# Altium PCB yakimenko_power_control.PcbDoc (part 1 of 2)
Units mm, origin at the board's own origin, x right, y up, seen from the top; angles counter-clockwise.
Board outline 110 x 51 mm, 2 copper layers (Top Layer, Bottom Layer), stack 1.536 mm thick; 65 components, 40 nets, 213 pads, 270 vias.
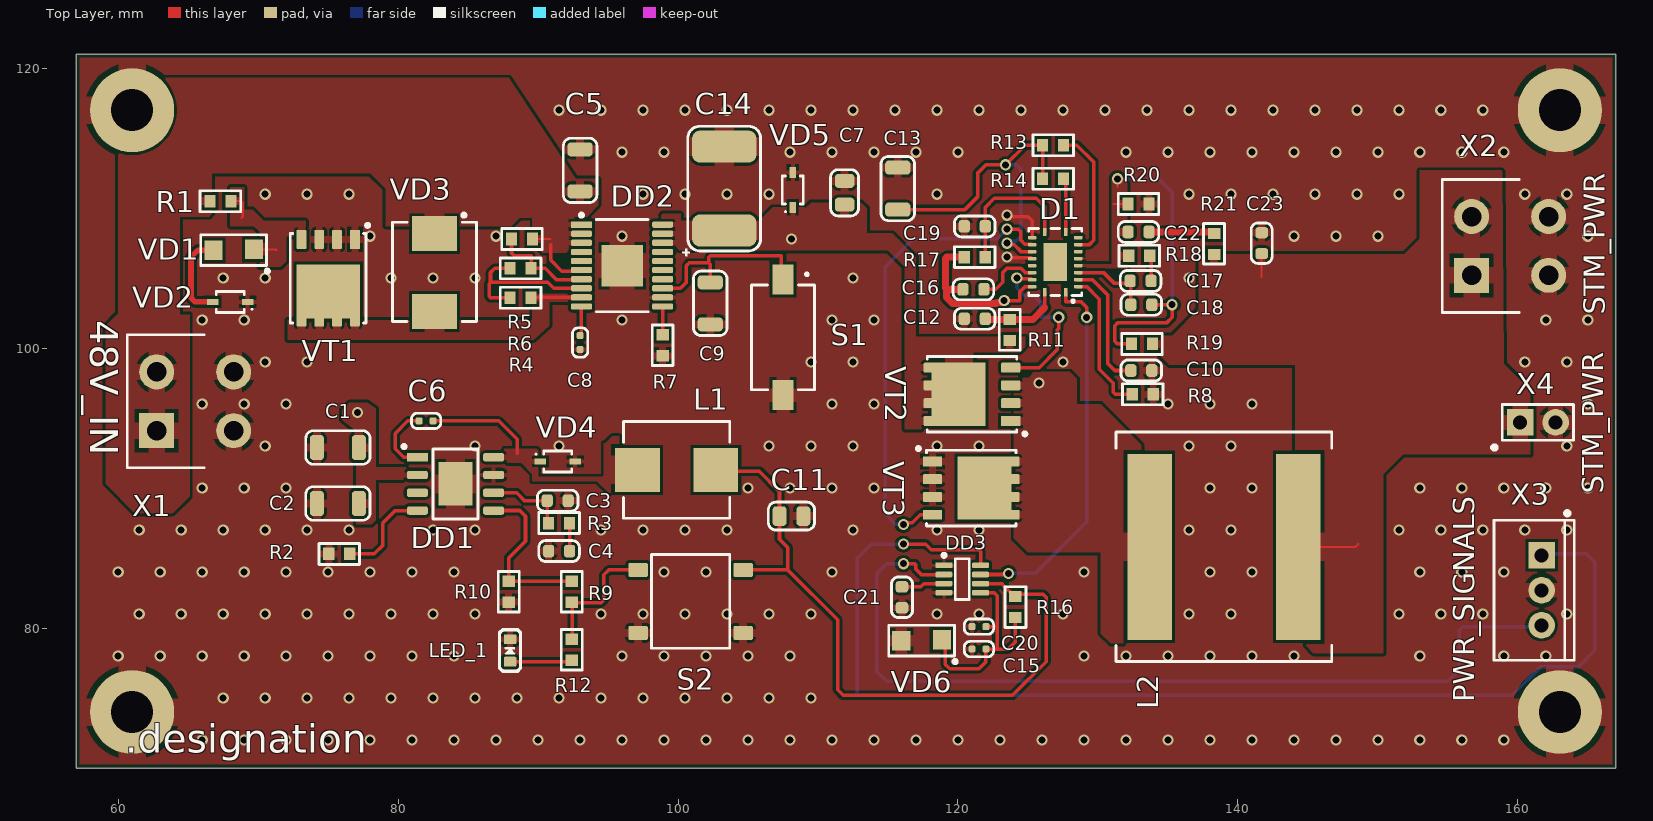
[diagram p0: Top Layer view]
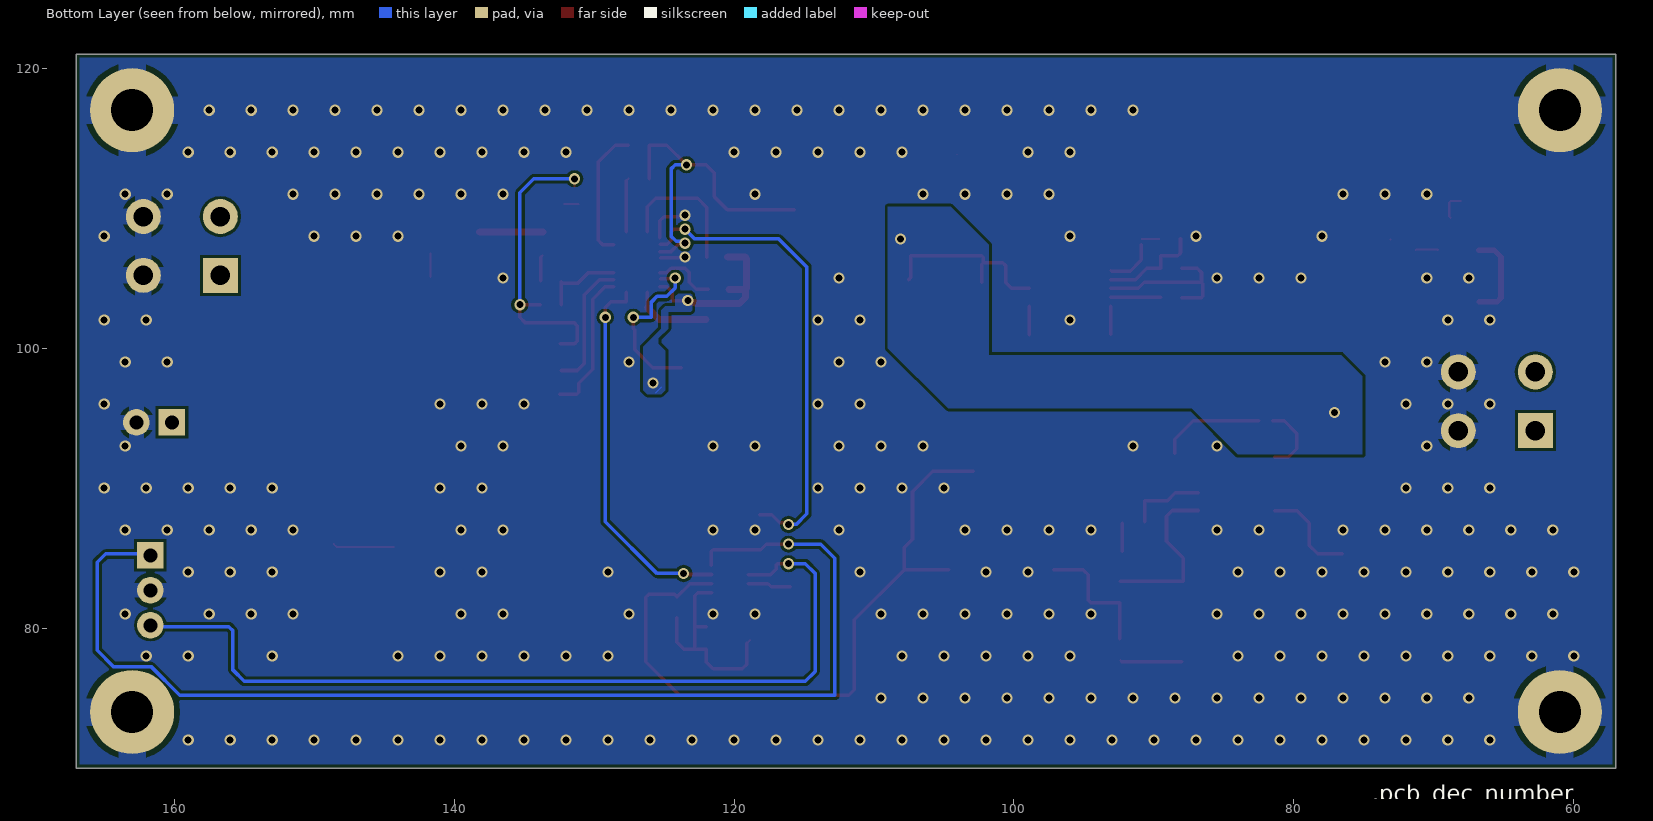
[diagram p1: Bottom Layer view, seen from below]
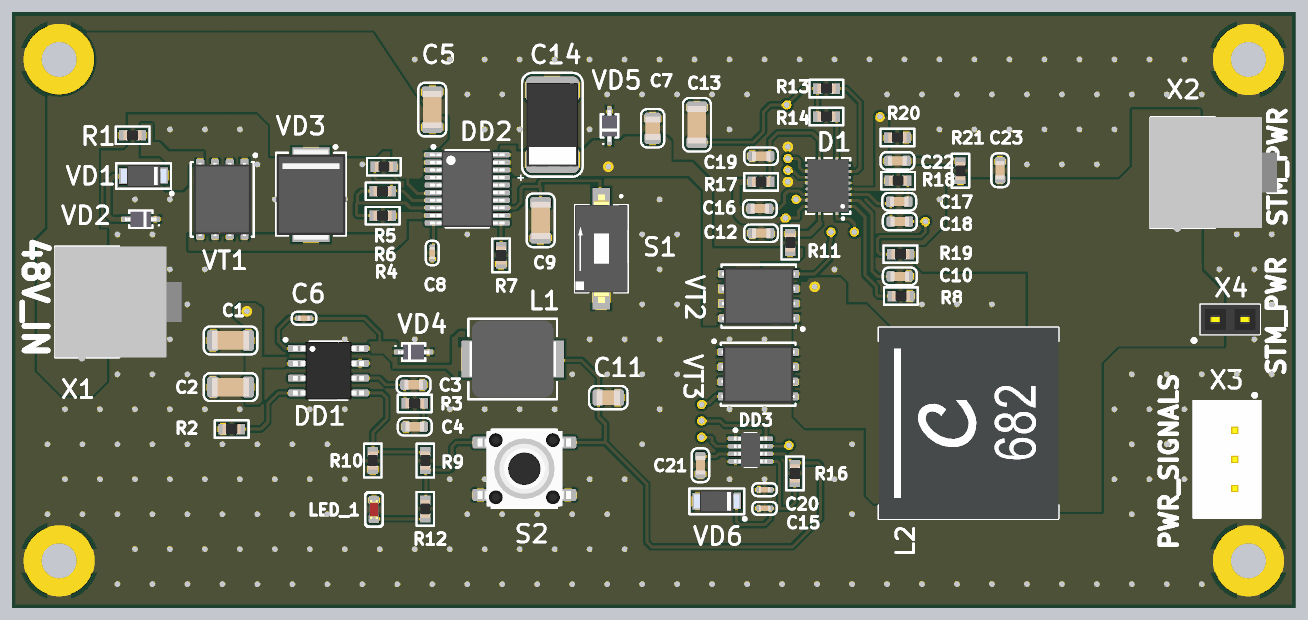
[diagram p2: 3D render of the assembled board from above, using the file's embedded part models]

## Layer stack, top to bottom
Top Solder: solder mask 0.0102, Solder Resist, Dk 3.5
Top Layer: signal copper 0.018
Core 1: core 1.5, FR4, Dk 4.6
Bottom Layer: signal copper 0.018
Bottom Solder: solder mask 0.0102, Solder Resist, Dk 3.5

## Board outline
57,70 167,70 167,121 57,121

## Design rules (kind name [scope] priority, off if disabled: settings)
AcuteAngle min_acute_angle [OnCopper] p1: minimum=3.50000000000000E+0001 checktracksonly=FALSE // Минимальный угол между примитивами топологии
BoardOutlineClearance board_outline_clearance_std [NOT (OnLayer('Bottom Overlay') OR OnLayer('Top Overlay'))] p1: gap=0.25 ignorepadtopadclearanceinfootprint=FALSE except(0: Arc-SplitContinuation Track-SplitContinuation SMDPad-SplitContinuation THPad-SplitContinuation Via-SplitContinuation Fill-SplitContinuation Poly-SplitContinuation Region-SplitContinuation Text-SplitContinuation) // Отступ элементов топологии от края фрезеруемой печатной платы
Clearance clearance_outer_18um_std [OnTopLayer OR OnBottomLayer] p1: gap=0.125 ignorepadtopadclearanceinfootprint=TRUE except(0.2: Arc-Fill Arc-Poly Track-Fill Track-Poly SMDPad-SMDPad SMDPad-Fill SMDPad-Poly THPad-Fill THPad-Poly Via-Fill Via-Poly Fill-Fill Fill-Poly Poly-Poly Poly-Region Poly-Text; 0.25: Arc-Hole Track-Hole SMDPad-Hole THPad-Hole Via-Hole Fill-Hole Poly-Hole Region-Hole Text-Hole) // Зазоры на внешних слоях
Clearance clearance_inner_18um_std [NOT (OnTopLayer Or OnBottomLayer)] p2: gap=0.125 ignorepadtopadclearanceinfootprint=FALSE except(0.2: Arc-Fill Arc-Poly Track-Fill Track-Poly SMDPad-SMDPad SMDPad-Fill SMDPad-Poly THPad-Fill THPad-Poly Via-Fill Via-Poly Fill-Fill Fill-Poly Poly-Poly Poly-Region Poly-Text; 0.25: Arc-Hole Track-Hole SMDPad-Hole THPad-Hole Via-Hole Fill-Hole Poly-Hole Region-Hole Text-Hole) // Зазоры на внутренних слоях
ComponentClearance [All] p1: gap=0 collisioncheckmode=3 verticalgap=0 showdistances=FALSE
DiffPairsRouting diff_pairs_routing [All] p1: maxlimit=0.127 minlimit=0.127 mostfreqgap=0.127 toplayer_minwidth=0.143 toplayer_maxwidth=0.143 toplayer_prefwidth=0.143 bottomlayer_minwidth=0.143 bottomlayer_maxwidth=0.143 bottomlayer_prefwidth=0.143 impedanceprofiledriven=TRUE impedanceprofileid={FD46899E-B5A2-4EF5-A302-5D2DB6A51F35} maxuncoupledlength=12.7 // Правила трассировки дифференциальных пар
HoleSize min_hole_size_std [IsPad] p1: absolutevalues=TRUE maxlimit=5.9 minlimit=0.6 maxpercent=80.000 minpercent=20.000 // Диаметр межслойного переходного отверстия
HoleSize min_hole_size_via_std [IsVia] p2: absolutevalues=TRUE maxlimit=5.9 minlimit=0.3 maxpercent=80.000 minpercent=20.000 // Минимальный диаметр монтажного отверстия
HoleToHoleClearance hole_to_hole_clearance_std [All] p1: gap=0.2 allowstackedmicrovias=FALSE // Минимальное расстояние между краями двух отверстий
MinimumAnnularRing min_via_ar_std [All] p1: minimumring=0.15 // Поясок площадки переходного отверстия (Annular ring VIA)
MinimumAnnularRing min_pad_ar_std [All] p2: minimumring=0.2 // Поясок монтажной контактной площадки (Annular ring PAD)
MinimumSolderMaskSliver min_solder_mask_bridge_std [All] p1 off: minsoldermaskwidth=0.15 // Мнимальная ширина масочного мостика
PlaneClearance plane_clearance_18um_std [All] p1: clearance=0.2 // Отступ полигона (для слоя plane) от элементов топологии
PlaneConnect [All] p1: planeconnectstyle=Relief reliefexpansion=0.5 reliefentries=4 reliefconductorwidth=0.2 reliefairgap=0.2
PolygonConnect poly_connect_to_pad<=0.3 [(AsMM(PadXSize_AllLayers)<=0.301) or (AsMM(PadYSize_AllLayers)<=0.301)] p1: thpad.connectstyle=Relief thpad.reliefconductorwidth=0.2 thpad.reliefentries=4 thpad.polygonreliefangle="90 Angle" thpad.airgapwidth=0.2 smdpad.connectstyle=Relief smdpad.reliefconductorwidth=0.2 smdpad.reliefentries=4 smdpad.polygonreliefangle="90 Angle" smdpad.airgapwidth=0.2 via.connectstyle=Direct via.reliefconductorwidth=0.254 via.reliefentries=4 via.polygonreliefangle="90 Angle" via.airgapwidth=0.254 // Правила подключения полигонов для падов от 0,3мм и меньше
PolygonConnect poly_connect_to_pad<=0.4 [(AsMM(PadXSize_AllLayers)<=0.401) or (AsMM(PadYSize_AllLayers)<=0.401)] p2: thpad.connectstyle=Relief thpad.reliefconductorwidth=0.26 thpad.reliefentries=4 thpad.polygonreliefangle="90 Angle" thpad.airgapwidth=0.2 smdpad.connectstyle=Relief smdpad.reliefconductorwidth=0.26 smdpad.reliefentries=4 smdpad.polygonreliefangle="90 Angle" smdpad.airgapwidth=0.2 via.connectstyle=Direct via.reliefconductorwidth=0.254 via.reliefentries=4 via.polygonreliefangle="90 Angle" via.airgapwidth=0.254 // Правила подключения полигонов для падов от 0,4 и меньше
PolygonConnect poly_connect_to_pad<=0.6 [(AsMM(PadXSize_AllLayers)<=0.601) or (AsMM(PadYSize_AllLayers)<=0.601)] p3: thpad.connectstyle=Relief thpad.reliefconductorwidth=0.33 thpad.reliefentries=4 thpad.polygonreliefangle="90 Angle" thpad.airgapwidth=0.2 smdpad.connectstyle=Relief smdpad.reliefconductorwidth=0.33 smdpad.reliefentries=4 smdpad.polygonreliefangle="90 Angle" smdpad.airgapwidth=0.2 via.connectstyle=Direct via.reliefconductorwidth=0.254 via.reliefentries=4 via.polygonreliefangle="90 Angle" via.airgapwidth=0.254 // Правила подключения полигонов для падов от 0,6мм и меньше
PolygonConnect poly_connect_to_pad<=0.7 [(AsMM(PadXSize_AllLayers)<=0.701) or (AsMM(PadYSize_AllLayers)<=0.701)] p4: thpad.connectstyle=Relief thpad.reliefconductorwidth=0.46 thpad.reliefentries=4 thpad.polygonreliefangle="90 Angle" thpad.airgapwidth=0.2 smdpad.connectstyle=Relief smdpad.reliefconductorwidth=0.46 smdpad.reliefentries=4 smdpad.polygonreliefangle="90 Angle" smdpad.airgapwidth=0.2 via.connectstyle=Direct via.reliefconductorwidth=0.254 via.reliefentries=4 via.polygonreliefangle="90 Angle" via.airgapwidth=0.254 // Правила подключения полигонов для падов от 0,7мм и меньше
PolygonConnect poly_connect_to_pad<=0.8 [(AsMM(PadXSize_AllLayers)<=0.8)or(AsMM(PadYSize_AllLayers)<=0.8)] p5: thpad.connectstyle=Relief thpad.reliefconductorwidth=0.53 thpad.reliefentries=4 thpad.polygonreliefangle="90 Angle" thpad.airgapwidth=0.3 smdpad.connectstyle=Relief smdpad.reliefconductorwidth=0.53 smdpad.reliefentries=4 smdpad.polygonreliefangle="90 Angle" smdpad.airgapwidth=0.2 via.connectstyle=Direct via.reliefconductorwidth=0.254 via.reliefentries=4 via.polygonreliefangle="90 Angle" via.airgapwidth=0.254 // Правила подключения полигонов для падов от 0,8мм и меньше
PolygonConnect poly_connect_to_pad<=1 [(AsMM(PadXSize_AllLayers)<=1.01)or(AsMM(PadYSize_AllLayers)<=1.01)] p6: thpad.connectstyle=Relief thpad.reliefconductorwidth=0.6 thpad.reliefentries=4 thpad.polygonreliefangle="90 Angle" thpad.airgapwidth=0.3 smdpad.connectstyle=Relief smdpad.reliefconductorwidth=0.6 smdpad.reliefentries=4 smdpad.polygonreliefangle="90 Angle" smdpad.airgapwidth=0.2 via.connectstyle=Direct via.reliefconductorwidth=0.254 via.reliefentries=4 via.polygonreliefangle="90 Angle" via.airgapwidth=0.254 // Правила подключения полигонов для падов от 1мм и меньше
PolygonConnect poly_connect_to_pad<=1.3 [(AsMM(PadXSize_AllLayers)<=1.31)or(AsMM(PadYSize_AllLayers)<=1.31)] p7: thpad.connectstyle=Relief thpad.reliefconductorwidth=0.66 thpad.reliefentries=4 thpad.polygonreliefangle="90 Angle" thpad.airgapwidth=0.3 smdpad.connectstyle=Relief smdpad.reliefconductorwidth=0.86 smdpad.reliefentries=4 smdpad.polygonreliefangle="90 Angle" smdpad.airgapwidth=0.2 via.connectstyle=Direct via.reliefconductorwidth=0.254 via.reliefentries=4 via.polygonreliefangle="90 Angle" via.airgapwidth=0.254 // Правила подключения полигонов для падов от 1,3мм и меньше
PolygonConnect poly_connect_to_pad<=1.6 [(AsMM(PadXSize_AllLayers)<=1.61)or(AsMM(PadYSize_AllLayers)<=1.61)] p8: thpad.connectstyle=Relief thpad.reliefconductorwidth=0.8 thpad.reliefentries=4 thpad.polygonreliefangle="90 Angle" thpad.airgapwidth=0.3 smdpad.connectstyle=Relief smdpad.reliefconductorwidth=1 smdpad.reliefentries=4 smdpad.polygonreliefangle="90 Angle" smdpad.airgapwidth=0.2 via.connectstyle=Direct via.reliefconductorwidth=0.254 via.reliefentries=4 via.polygonreliefangle="90 Angle" via.airgapwidth=0.254 // Правила подключения полигонов для падов от 1,6мм и меньше
PolygonConnect poly_connect_to_pad<=1.8 [(AsMM(PadXSize_AllLayers)<=1.8)or(AsMM(PadYSize_AllLayers)<=1.8)] p9: thpad.connectstyle=Relief thpad.reliefconductorwidth=1 thpad.reliefentries=4 thpad.polygonreliefangle="90 Angle" thpad.airgapwidth=0.3 smdpad.connectstyle=Relief smdpad.reliefconductorwidth=1.2 smdpad.reliefentries=4 smdpad.polygonreliefangle="90 Angle" smdpad.airgapwidth=0.2 via.connectstyle=Direct via.reliefconductorwidth=0.254 via.reliefentries=4 via.polygonreliefangle="90 Angle" via.airgapwidth=0.254 // Правила подключения полигонов для падов от 1,8мм и меньше
PolygonConnect poly_connect_to_pad<=2 [(AsMM(PadXSize_AllLayers)<=2.01)or(AsMM(PadYSize_AllLayers)<=2.01)] p10: thpad.connectstyle=Relief thpad.reliefconductorwidth=1.1 thpad.reliefentries=4 thpad.polygonreliefangle="90 Angle" thpad.airgapwidth=0.3 smdpad.connectstyle=Relief smdpad.reliefconductorwidth=1.4 smdpad.reliefentries=4 smdpad.polygonreliefangle="90 Angle" smdpad.airgapwidth=0.2 via.connectstyle=Direct via.reliefconductorwidth=0.254 via.reliefentries=4 via.polygonreliefangle="90 Angle" via.airgapwidth=0.254 // Правила подключения полигонов для падов от 2мм и меньше
PolygonConnect poly_connect_to_pad<=2.3 [(AsMM(PadXSize_AllLayers)<=2.31)or(AsMM(PadYSize_AllLayers)<=2.31)] p11: thpad.connectstyle=Relief thpad.reliefconductorwidth=1.2 thpad.reliefentries=4 thpad.polygonreliefangle="90 Angle" thpad.airgapwidth=0.3 smdpad.connectstyle=Relief smdpad.reliefconductorwidth=1.4 smdpad.reliefentries=4 smdpad.polygonreliefangle="90 Angle" smdpad.airgapwidth=0.2 via.connectstyle=Direct via.reliefconductorwidth=0.254 via.reliefentries=4 via.polygonreliefangle="90 Angle" via.airgapwidth=0.254 // Правила подключения полигонов для падов от 2,3мм и меньше
PolygonConnect poly_connect_to_pad<=2.5 [(AsMM(PadXSize_AllLayers)<=2.51)or(AsMM(PadYSize_AllLayers)<=2.51)] p12: thpad.connectstyle=Relief thpad.reliefconductorwidth=1.2 thpad.reliefentries=4 thpad.polygonreliefangle="90 Angle" thpad.airgapwidth=0.3 smdpad.connectstyle=Relief smdpad.reliefconductorwidth=1.4 smdpad.reliefentries=4 smdpad.polygonreliefangle="90 Angle" smdpad.airgapwidth=0.2 via.connectstyle=Direct via.reliefconductorwidth=0.254 via.reliefentries=4 via.polygonreliefangle="90 Angle" via.airgapwidth=0.254 // Правила подключения полигонов для падов от 2,5мм и меньше
PolygonConnect poly_connect_to_pad<=2.7 [(AsMM(PadXSize_AllLayers)<=2.71)or(AsMM(PadYSize_AllLayers)<=2.71)] p13: thpad.connectstyle=Relief thpad.reliefconductorwidth=1.4 thpad.reliefentries=4 thpad.polygonreliefangle="90 Angle" thpad.airgapwidth=0.3 smdpad.connectstyle=Relief smdpad.reliefconductorwidth=1.6 smdpad.reliefentries=4 smdpad.polygonreliefangle="90 Angle" smdpad.airgapwidth=0.2 via.connectstyle=Direct via.reliefconductorwidth=0.254 via.reliefentries=4 via.polygonreliefangle="90 Angle" via.airgapwidth=0.254 // Правила подключения полигонов для падов от 2,7мм и меньше
PolygonConnect poly_connect_to_pad<=3 [(AsMM(PadXSize_AllLayers)<=3.01)or(AsMM(PadYSize_AllLayers)<=3.01)] p14: thpad.connectstyle=Relief thpad.reliefconductorwidth=1.6 thpad.reliefentries=4 thpad.polygonreliefangle="90 Angle" thpad.airgapwidth=0.3 smdpad.connectstyle=Relief smdpad.reliefconductorwidth=1.8 smdpad.reliefentries=4 smdpad.polygonreliefangle="90 Angle" smdpad.airgapwidth=0.2 via.connectstyle=Direct via.reliefconductorwidth=0.254 via.reliefentries=4 via.polygonreliefangle="90 Angle" via.airgapwidth=0.254 // Правила подключения полигонов для падов от 3мм и меньше
PolygonConnect poly_connect_to_pad<=7 [(AsMM(PadXSize_AllLayers)<7.01)or(AsMM(PadYSize_AllLayers)<=7.01)] p15: thpad.connectstyle=Relief thpad.reliefconductorwidth=2 thpad.reliefentries=4 thpad.polygonreliefangle="90 Angle" thpad.airgapwidth=0.4 smdpad.connectstyle=Relief smdpad.reliefconductorwidth=2 smdpad.reliefentries=4 smdpad.polygonreliefangle="90 Angle" smdpad.airgapwidth=0.3 via.connectstyle=Direct via.reliefconductorwidth=0.254 via.reliefentries=4 via.polygonreliefangle="90 Angle" via.airgapwidth=0.254 // Правила подключения полигонов для падов от 7мм и меньше
PolygonConnect poly_connect_to_pad [All] p16: thpad.connectstyle=Relief thpad.reliefconductorwidth=0.25 thpad.reliefentries=4 thpad.polygonreliefangle="90 Angle" thpad.airgapwidth=0.2 smdpad.connectstyle=Relief smdpad.reliefconductorwidth=0.25 smdpad.reliefentries=4 smdpad.polygonreliefangle="90 Angle" smdpad.airgapwidth=0.2 via.connectstyle=Direct via.reliefconductorwidth=0.25 via.reliefentries=4 via.polygonreliefangle="90 Angle" via.airgapwidth=0.2 // Правила подключения полигонов общие
RoutingCorners [All] p1 off: cornerstyle=45-Degree minsetback=2.5 maxsetback=2.5
RoutingVias [All] p1: holewidth=0.3 width=0.6 viastyle="Through Hole" minholewidth=0.3 minwidth=0.6 maxholewidth=5.9 maxwidth=6.4
SilkToSilkClearance silk_to_silk_clearance_std [All] p1 off: silktosilkclearance=0.15 // Отступ текста шелкографии от других примитивов шелкографии
SilkToSolderMaskClearance silk_to_solder_mask_clearance_std [IsPad] p1 off: minsilkscreentomaskgap=0.15 clearancetoexposedcopper=FALSE // Минимальное расстояние между элементами шелкографии и вскрытой медью
SolderMaskExpansion solder_mask_expansion_std [All] p1: expansion=0.05 // Припуск паяльной масски
UnRoutedNet [All] p1: checkbadconnections=TRUE
Width width_18um_std [All] p1: maxlimit=10 minlimit=0.125 preferedwidth=0.15 checkconnectedcopper=TRUE // Ширина проводников (общая)
19 further rules are at their usual default settings.

## Components (designator, comment, footprint, x,y, rotation, side; value= is the part's Value field where it differs from the comment)
C1 "2,2 мк" C1206 75.7,92.9 r180 top
C2 "2,2 мк" C1206 75.7,88.9 r180 top
C3 "82" C0603 91.4,89.1 r0 top
C4 "0,022 мк" C0603 91.5,85.5 r180 top
C5 "1 мк" C1206 93,112.7 r90 top
C6 "0,1 мк" C0402 82,94.8 r180 top
C7 "4,7 мк" C0805 111.9,111.1 r90 top
C8 "6800" C0402 93,100.4 r270 top
C9 "1 мк" C1206 102.3,103.2 r270 top
C10 "0,018 мк" C0603 133.1,98.4 r0 top
C11 "22 мк" C0805 108.1,88 r0 top
C12 "0,01 мк" C0603 121.2,102.1 r180 top
C13 "2,2 мк" C1206 115.7,111.4 r90 top
C14 "47 мк" C7343-31 103.3,111.4 r90 top
C15 "0,1 мк" C0402 121.5,78.5 r180 top
C16 "0,01 мк" C0603 121.1,104.2 r180 top
C17 "0,012 мк" C0603 133.05,104.8 r180 top
C18 "1" C0603 133.1,103.1 r180 top
C19 "3" C0603 121.2,108.7 r180 top
C20 "0,1 мк" C0402 121.5,80.1 r180 top
C21 "0,47 мк" C0603 116,82.2 r270 top
C22 "470" C0603 132.9,108.3 r180 top
C23 "0,01 мк" C0603 141.7,107.5 r270 top
D1 "LM5145RGY" VQFN-20-P50-450X350X100-L40X25-T270X170 126.95,106.15 r180 top
DD1 "TPS54360BDDA" HSOIC-8-P127-490X390X170-L84X41-T310X240 84.1,90.3 r0 top
DD2 "TPS16630PWPR" HTSSOP-20-P65-650X440X120-L63X25-T296X296 96,105.9 r0 top
DD3 "LTC2955ITS8-1" SOT-23-8-P65-290X280X100 120.3,83.5 r0 top
L1 "SRP7028A-220M" SRP-2-730X660X280 99.9,91.3 r0 top
L2 "XAL1510-822MEB" XAL-2-1620X1520X1000 139,85.8 r0 top
LED_1 "TLMS1000-GS08" HL0603 88,78.4 r270 top (schematic designator "PWR OUT1")
R1 "750" R0603 67.3,110.5 r180 top
R2 "97,6 к" R0603 75.8,85.3 r0 top
R3 "4,99 к" R0603 91.5,87.5 r180 top
R4 "1,54 М" R0603 88.85,107.8 r0 top
R5 "8,06 к" R0603 88.75,105.7 r0 top
R6 "40,2 к" R0603 88.75,103.6 r180 top
R7 "5,1 к" R0603 98.9,100.2 r270 top
R8 "18,7 к" R0603 133.2,96.7 r180 top
R9 "53,6 к" R0603 92.4,82.6 r270 top
R10 "10,2 к" R0603 87.9,82.6 r90 top
R11 "2,1" R0603 123.7,101.3 r270 top
R12 "220" R0603 92.4,78.45 r90 top
R13 "20 к" R0603 126.8,114.5 r0 top
R14 "20 к" R0603 126.8,112.1 r0 top
R16 "1 к" R0603 124.1,81.5 r90 top
R17 "1,96 к" R0603 121.2,106.5 r180 top
R18 "3,92 к" R0603 132.95,106.6 r180 top
R19 "18 к" R0603 133.15,100.3 r0 top
R20 "620" R0603 132.9,110.3 r180 top
R21 "11,8" R0603 138.3,107.45 r270 top
S1 "SDA01H1SBD" SDA01H1SBD 107.5,100.775 r270 top
S2 "KLS7-TS6604-5.0-180-B" KLS7-TS6604-5.0-180-B 100.9,81.9 r0 top
VD1 "BZD17C15P" DO-219AB-280X180X108 68.25,107 r180 top
VD2 "BAS170WS-HE3-08" SOD-123-268X130X115 68,103.3 r180 top
VD3 "1.5SMC62CA" DO-214AB-790X590X262 82.6,105.4 r270 top
VD4 "BAS170WS-HE3-08" SOD-123-268X130X115 91.4,91.9 r0 top
VD5 "BAS170WS-HE3-08" SOD-123-268X130X115 108.2,111.3 r90 top
VD6 "BZD17C5V1P" DO-219AB-280X180X108 117.4,79.1 r180 top
VT1 "CSD19532Q5BT" VSONP-8-P127-600X500X105 75,105 r180 top
VT2 "CSD19532Q5BT" VSONP-8-P127-600X500X105 121,96.7 r90 top
VT3 "GQM2195C2A3R0CB01D" VSONP-8-P127-600X500X105 120.95,90 r270 top
X1 "4-1775099-0" 4-1775099-0 65.4,96.2 r90 top
X2 "4-1775099-0" 4-1775099-0 159.35,107.3 r90 top
X3 "DS1069-3MVW6X" DS1069-3MVW6X 161.163,82.701 r270 top
X4 "DS1023-1x2SF11" DS1023-1X2SF11 161.43,94.7 r0 top

## Footprints (in the part's own frame and the unit in brackets; to place one, negate y for a bottom-side part, rotate by r counter-clockwise, add the part's x,y. Pads: shape width x height; smd on the part's side, far side on the other; paste and mask are expansions set on the pad)
4-1775099-0 [mm] "ATX Power 4 Pins Mount Header, V/A Type"
  rect 2.5x2.5 hole 1.4: 1(-2.1,2.65)
  round 2.5 hole 1.4: 2(2.1,2.65) 3(-2.1,-2.85) 4(2.1,-2.85)
  silkscreen extent -4.75,-0.75 4.75,4.75, body extent -5.1,-6.1 4.75,4.8, height 12.8
C0402 [mm] "Chip Capacitor, 2-Leads, Body 1,00x0,50mm, IPC Medium Density"
  rrect50% 0.5x0.5 smd: 1(-0.5,0) 2(0.5,0)
  silkscreen extent -1.05,-0.55 1.05,0.55, body extent -0.5,-0.25 0.5,0.25, height 0.5
C0603 [mm] "Chip Capacitor, 2-Leads, Body 1,60x0,80mm, IPC Medium Density"
  rrect50% 0.8x0.9 smd: 1(-0.75,0) 2(0.75,0)
  silkscreen extent -1.45,-0.75 1.45,0.75, body extent -0.8,-0.4 0.8,0.4, height 0.8
C0805 [mm] "Chip Capasitor, 2-Leads, Body 2,00x1,25mm, IPC Medium Density"
  rrect50% 1x1.4 smd: 1(-0.85,0) 2(0.85,0)
  silkscreen extent -1.65,-1 1.65,1, body extent -1,-0.62 1,0.63, height 0.6
C1206 [mm] "Chip Capacitor, 2-Leads, Body 3,20x1,60mm, IPC Medium Density"
  rrect50% 1x1.8 smd: 1(-1.5,0) 2(1.5,0)
  silkscreen extent -2.3,-1.2 2.3,1.2, body extent -1.6,-0.8 1.6,0.8, height 0.78
C7343-31 [mm] "Chip Capacitor, 2-Leads, Body 7,30x4,30mm, IPC Medium Density"
  rrect50% 2.3x4.6 smd: 1(-3,0) 2(3,0)
  Top Layer lines w0.05: 2.425,-0.75 2.45,-0.75
  silkscreen extent -4.8,-2.6 4.45,2.95, body extent -3.6,-2.21 3.59,2.21, height 2.92
DO-214AB-790X590X262 [mm] "Molded Diode, 2-Leads, Body 7,90x5,90mm, IPC Medium Density"
  rect 2.5x3.2 smd: 1(-2.8,0) 2(2.8,0)
  silkscreen extent -4.22,-3 3.5,3, body extent -3.95,-2.95 3.95,2.95, height 2.59
DO-219AB-280X180X108 [mm] "Molded Diode, 2-Leads, Body 2,80x1,80mm, IPC Medium Density"
  rect 1.3x1.4 smd: 1(-1.45,-0.05) 2(1.45,0)
  silkscreen extent -2.45,-1.1 2.35,1.55, body extent -1.95,-0.95 1.95,0.95, height 1.25
DS1023-1X2SF11 [mm] "PBS 2 Pins 2,54mm Socket Header V/T Blanking Type"
  rect 1.9x1.9 hole 1: 1(-1.27,0)
  round 1.9 hole 1: 2(1.27,0)
  silkscreen extent -3.1,-1.8 2.55,1.28, body extent -2.54,-1.27 2.54,1.27, height 8.5
DS1069-3MVW6X [mm] "CWF 3 Pins Plug Header, Pitch 2,5mm, V/T Type"
  rect 1.9x1.9 hole 1: 1(-2.499,0.537)
  round 1.9 hole 1: 2(0.001,0.537) 3(2.501,0.537)
  silkscreen extent -5.5,-2.87 5,2.87, body extent -5,-2.87 5,2.87, height 7
HL0603 [mm] "Chip Resistor, 2-Leads, Body 1,60x0,80mm, IPC Medium Density"
  rrect25% 0.7x0.9 smd: 1(-0.8,0) 2(0.8,0)
  silkscreen extent -1.5,-0.75 1.5,0.75, body extent -0.81,-0.4 0.81,0.4, height 0.64
HSOIC-8-P127-490X390X170-L84X41-T310X240 [mm] "SOIC, 8-Leads, Body 4,90x3,90mm, Pitch 1,27mm, Thermal Pad 3,10x2,40mm, IPC Medium Density"
  rect 2.4x3.1 smd: 0(0,0)
  rect 1.5x0.6 smd: 1(-2.725,1.905)
  rrect50% 1.5x0.6 smd: 2(-2.725,0.635) 3(-2.725,-0.635) 4(-2.725,-1.905) 5(2.725,-1.905) 6(2.725,-0.635) 7(2.725,0.635) 8(2.725,1.905)
  silkscreen extent -3.81,-2.5 1.6,2.79, body extent -3.06,-2.47 3.06,2.48, height 1.7
HTSSOP-20-P65-650X440X120-L63X25-T296X296 [mm] "TSOP, 20-Leads, Body 6,50x4,40mm, Pitch 0,65mm, Thermal Pad 2.96x2.96mm, IPC Medium Density"
  rect 2.96x2.96 smd: 0(0,0)
  rect 1.5x0.45 smd: 1(-2.9,2.925)
  rrect50% 1.5x0.45 smd: 2(-2.9,2.275) 3(-2.9,1.625) 4(-2.9,0.975) 5(-2.9,0.325) 6(-2.9,-0.325) 7(-2.9,-0.975) 8(-2.9,-1.625) 9(-2.9,-2.275) 10(-2.9,-2.925) 11(2.9,-2.925) 12(2.9,-2.275) 13(2.9,-1.625) 14(2.9,-0.975) 15(2.9,-0.325) 16(2.9,0.325) 17(2.9,0.975) 18(2.9,1.625) 19(2.9,2.275) 20(2.9,2.925)
  silkscreen extent -3.02,-3.3 1.85,3.72, body extent -3.2,-3.25 3.2,3.25, height 1.13
KLS7-TS6604-5.0-180-B [mm]
  rrect25% 1.4x1 smd: 1(-3.75,2.25) 1(3.75,2.25) 2(-3.75,-2.25) 2(3.75,-2.25)
  silkscreen extent -2.79,-3.35 2.79,3.35, body extent -4,-3.25 4,3.25, height 4.3
R0603 [mm] "Chip Resistor, 2-Leads, Body 1,60x0,80mm, IPC Medium Density"
  rect 0.8x0.9 smd: 1(-0.75,0) 2(0.75,0)
  silkscreen extent -1.45,-0.75 1.45,0.75, body extent -0.77,-0.43 0.78,0.43, height 0.43
SDA01H1SBD [mm]
  rect 2.15x1.5 smd: 1(-4.125,0) 2(4.125,0)
  silkscreen extent -4.6,-2.26 3.74,2.26, body extent -4.65,-2.26 4.65,2.26, height 5.44
SOD-123-268X130X115 [mm] "SODFL, 2-Leads, Body 1,30x2,67mm, IPC Medium Density"
  rect 0.8x0.45 smd: 1(-1.25,0) 2(1.25,0)
  silkscreen extent -1.6,-0.75 1,0.75, body extent -1.34,-0.65 1.34,0.65, height 0.94
SOT-23-8-P65-290X280X100 [mm] "SOT, 8-Leads, Body 2,90x2,80mm, Pitch 0,65mm, IPC Medium Density"
  rect 1.22x0.4 smd: 1(-1.31,0.975)
  rrect50% 1.22x0.4 smd: 2(-1.31,0.325) 3(-1.31,-0.325) 4(-1.31,-0.975) 5(1.31,-0.975) 6(1.31,-0.325) 7(1.31,0.325) 8(1.31,0.975)
  silkscreen extent -1.42,-1.45 0.5,1.82, body extent -1.4,-1.45 1.4,1.45, height 1
SRP-2-730X660X280 [mm] "Precision Wire Wound Inductor, 2-Leads, Body 7,30x6,60mm, IPC Medium Density"
  rect 3.2x3.15 smd: 1(-2.8,0) 2(2.8,0)
  silkscreen extent -3.8,-3.45 3.8,3.45, body extent -3.7,-3.3 3.7,3.3, height 3
VQFN-20-P50-450X350X100-L40X25-T270X170 [mm] "VQFN, 20-Leads, Body 3,50x2,50mm, Pitch 0,50mm, Thermal Pad 2,70x1,70mm, IPC Medium Density"
  rect 1.7x2.7 smd: 0(0,0)
  rect 0.25x0.6 smd: 1(-0.75,2.15)
  rrect50% 0.6x0.25 smd: 2(-1.65,1.75) 3(-1.65,1.25) 4(-1.65,0.75) 5(-1.65,0.25) 6(-1.65,-0.25) 7(-1.65,-0.75) 8(-1.65,-1.25) 9(-1.65,-1.75) 12(1.65,-1.75) 13(1.65,-1.25) 14(1.65,-0.75) 15(1.65,-0.25) 16(1.65,0.25) 17(1.65,0.75) 18(1.65,1.25) 19(1.65,1.75)
  rrect50% 0.25x0.6 smd: 10(-0.75,-2.15) 11(0.75,-2.15) 20(0.75,2.15)
  silkscreen extent -1.9,-2.4 1.9,2.86, body extent -1.75,-2.25 1.75,2.25, height 1
VSONP-8-P127-600X500X105 [mm] "VSONP, 8-Leads, Body 6,00x5,00mm, Pitch 1,27mm, Thermal Pad 4,44x4,52mm,IPC Medium Density"
  rrect25% 0.71x1.372 smd paste-10: D(-1.905,2.77) D(-0.635,2.77) D(0.635,2.77) D(1.905,2.77)
  rect 4.52x3.85 smd paste-10: D(0,0.95)
  rrect25% 0.71x1.372 smd paste-0.002: G(1.905,-2.77) S(-0.635,-2.77) S(0.635,-2.77)
  rect 0.71x1.372 smd paste-0.002: S(-1.905,-2.77)
  silkscreen extent -2.83,-3.78 2.7,3.2, body extent -2.45,-3.13 2.45,3.13, height 1.15
XAL-2-1620X1520X1000 [mm] "Precision Wire Wound Inductor, 2-Leads, Body 16,20x15,20mm, IPC Medium Density"
  rect 3.18x13.3 smd: 1(-5.3,0) 2(5.3,0)
  silkscreen extent -7.7,-8.2 7.7,8.2, body extent -7.7,-8.2 7.7,8.2, height 10

## Part data
C1 C2 C13: library part c0131, "=Описание", HelpURL=https://www.yageo.com/upload/media/product/productsearch/datasheet/mlcc/UPY-NP0X7R_MV_100-to-630V_22.pdf, ID=c0131, Корпус=1206, Наименование=CC1206KKX7R0BB225, Напряжение="100 В", Номинал="2,2 мк", Номинальное напряжение="100 В", Описание="Конденсатор керамический чип 1206 2,2 мкФ 100 В ±10 %", Отклонение="±10 %", Производитель="YAGEO Corp.", Рабочие температуры="от –55 °С до +125 °С", Температурный коэффициент емкости=X7R, Фамилия=Ларионов
C3: library part c0026, "=Описание", HelpURL=https://www.yageo.com/upload/media/product/productsearch/datasheet/mlcc/UPY-GP_NP0_16V-to-50V_18.pdf, ID=c0026, Корпус=0603, Наименование=CC0603JRNPO7BN820, Напряжение="16 В", Номинал=82, Номинальное напряжение="16 В", Описание="Конденсатор керамический чип 0603 82 пФ 16 В ±5 %", Отклонение="±5 %", Производитель="YAGEO Corp.", Рабочие температуры="от –55 °С до +125 °С", Температурный коэффициент емкости=C0G, Фамилия=Ларионов
C4: library part c0071, "=Описание", HelpURL=https://www.yageo.com/upload/media/product/productsearch/datasheet/mlcc/UPY-GPHC_X7R_6.3V-to-50V_20.pdf, ID=c0071, Корпус=0603, Наименование=CC0603KRX7R9BB223, Напряжение="50 В", Номинал="0,022 мк", Номинальное напряжение="50 В", Описание="Конденсатор керамический чип 0603 22 нФ 50 В ±10 %", Отклонение="±10 %", Производитель="YAGEO Corp.", Рабочие температуры="от –55 °С до +125 °С", Температурный коэффициент емкости=X7R, Фамилия=Паньков
C5 C9: library part c0120, "=Описание", HelpURL=https://www.yageo.com/upload/media/product/productsearch/datasheet/mlcc/UPY-NP0X7R_MV_100-to-630V_22.pdf, ID=c0120, Корпус=1206, Наименование=CC1206KKX7R0BB105, Напряжение="100 В", Номинал="1 мк", Номинальное напряжение="100 В", Описание="Конденсатор керамический чип 1206 1 мкФ 100 В ±10 %", Отклонение="±10 %", Производитель="YAGEO Corp.", Рабочие температуры="от –55 °С до +125 °С", Температурный коэффициент емкости=X7R, Фамилия=Ларионов
C6 C15 C20: library part c0086, "=Описание", HelpURL=https://www.yageo.com/upload/media/product/productsearch/datasheet/mlcc/UPY-GPHC_X5R_4V-to-50V_26.pdf, ID=c0086, Корпус=0402, Наименование=CC0402KRX5R9BB104, Напряжение="50 В", Номинал="0,1 мк", Номинальное напряжение="50 В", Описание="Конденсатор керамический чип 0402 100 нФ 50 В ±10 %", Отклонение="±10 %", Производитель="YAGEO Corp.", Рабочие температуры="от –55 °С до +85 °С", Температурный коэффициент емкости=X5R, Фамилия=Паньков
C7: library part c0140, "=Описание", HelpURL=https://www.yageo.com/upload/media/product/productsearch/datasheet/mlcc/UPY-GPHC_X5R_4V-to-50V_26.pdf, ID=c0140, Корпус=0805, Наименование=CC0805KKX5R9BB475, Напряжение="50 В", Номинал="4,7 мк", Номинальное напряжение="50 В", Описание="Конденсатор керамический чип 0805 4,7 мкФ 50 В ±10 %", Отклонение="±10 %", Производитель="YAGEO Corp.", Рабочие температуры="от –55 °С до +85 °С", Температурный коэффициент емкости=X5R, Фамилия=Паньков
C8: library part c0008, "=Описание", HelpURL=http://product.samsungsem.com/mlcc/CL05B682JB5NNN.do, ID=c0008, Корпус=0402, Наименование=CL05B682JB5NNNC, Напряжение="50 В", Номинал=6800, Номинальное напряжение="50 В", Описание="Конденсатор керамический чип 0402 6,8 нФ 50 В ±5 %", Отклонение="±5 %", Производитель="Samsung Electro-Mechanics", Рабочие температуры="от –55 °С до +125 °С", Температурный коэффициент емкости=X7R, Фамилия=Жернаков
C10: library part c0064, "=Описание", HelpURL=https://www.yageo.com/upload/media/product/productsearch/datasheet/mlcc/UPY-GPHC_X7R_6.3V-to-50V_20.pdf, ID=c0064, Корпус=0603, Наименование=CC0603JRX7R9BB183, Напряжение="50 В", Номинал="0,018 мк", Номинальное напряжение="50 В", Описание="Конденсатор керамический чип 0603 18 нФ 50 В ±5 %", Отклонение="±5 %", Производитель="YAGEO Corp.", Рабочие температуры="от –55 °С до +125 °С", Температурный коэффициент емкости=X7R, Фамилия=Паньков
C11: library part c0158, "=Описание", HelpURL=https://www.yageo.com/upload/media/product/productsearch/datasheet/mlcc/UPY-GPHC_X5R_4V-to-50V_26.pdf, ID=c0158, Корпус=0805, Наименование=CC0805MKX5R6BB226, Напряжение="10 В", Номинал="22 мк", Номинальное напряжение="10 В", Описание="Конденсатор керамический чип 0805 22 мкФ 10 В ±20 %", Отклонение="±20 %", Производитель="YAGEO Corp.", Рабочие температуры="от –55 °С до +85 °С", Температурный коэффициент емкости=X5R, Фамилия=Паньков
C12 C16 C23: library part c0059, "=Описание", HelpURL=https://www.yageo.com/upload/media/product/productsearch/datasheet/mlcc/UPY-NP0X7R_MV_100-to-630V_22.pdf, ID=c0059, Корпус=0603, Наименование=CC0603JRX7R0BB103, Напряжение="100 В", Номинал="0,01 мк", Номинальное напряжение="100 В", Описание="Конденсатор керамический чип 0603 10 нФ 100 В ±5 %", Отклонение="±5 %", Производитель="YAGEO Corp.", Рабочие температуры="от –55 °С до +125 °С", Температурный коэффициент емкости=X7R, Фамилия=Ларионов
C14: library part c0127, "=Описание", HelpURL=https://www.vishay.com/capacitors/list/product-40002/, ID=c0127, Корпус=7343-31, Наименование=293D476X9025D2TE3, Напряжение="25 В", Номинал="47 мк", Номинальное напряжение="25 В", Описание="Конденсатор танталовый чип 7343-31 47 мкФ 25 В ±10 %", Отклонение="±10 %", Производитель="Vishay Intertechnology, Inc.", Рабочие температуры="от –55 °С до +125 °С", Среднеквадратичный размах пульсации тока="0,46 А", Фамилия=Паньков, Эквивалентное последовательное сопротивление="0,7 Ом"
C17: library part c0061, "=Описание", HelpURL=https://www.yageo.com/upload/media/product/productsearch/datasheet/mlcc/UPY-GPHC_X7R_6.3V-to-50V_20.pdf, ID=c0061, Корпус=0603, Наименование=CC0603JRX7R9BB123, Напряжение="50 В", Номинал="0,012 мк", Номинальное напряжение="50 В", Описание="Конденсатор керамический чип 0603 12 нФ 50 В ±5 %", Отклонение="±5 %", Производитель="YAGEO Corp.", Рабочие температуры="от –55 °С до +125 °С", Температурный коэффициент емкости=X7R, Фамилия=Паньков
C18: library part c0014, "=Описание", HelpURL=https://www.yageo.com/upload/media/product/productsearch/datasheet/mlcc/UPY-GP_NP0_16V-to-50V_18.pdf, ID=c0014, Корпус=0603, Наименование=CC0603BRNPO9BN1R0, Напряжение="50 В", Номинал=1, Номинальное напряжение="50 В", Описание="Конденсатор керамический чип 0603 1 пФ 50 В ±0,1 пФ", Отклонение="±0,1 пФ", Производитель="YAGEO Corp.", Рабочие температуры="от –55 °С до +125 °С", Температурный коэффициент емкости=C0G, Фамилия=Паньков
C19: library part c0016, "=Описание", HelpURL=https://www.yageo.com/upload/media/product/productsearch/datasheet/mlcc/UPY-GP_NP0_16V-to-50V_18.pdf, ID=c0016, Корпус=0603, Наименование=CC0603BRNPO9BN3R0, Напряжение="50 В", Номинал=3, Номинальное напряжение="50 В", Описание="Конденсатор керамический чип 0603 3 пФ 50 В ±0,1 пФ", Отклонение="±0,1 пФ", Производитель="YAGEO Corp.", Рабочие температуры="от –55 °С до +125 °С", Температурный коэффициент емкости=C0G, Фамилия=Паньков
C21: library part c0104, "=Описание", HelpURL=https://www.yageo.com/upload/media/product/productsearch/datasheet/mlcc/UPY-GPHC_X5R_4V-to-50V_26.pdf, ID=c0104, Корпус=0603, Наименование=CC0603KRX5R7BB474, Напряжение="16 В", Номинал="0,47 мк", Номинальное напряжение="16 В", Описание="Конденсатор керамический чип 0603 470 нФ 16 В ±10 %", Отклонение="±10 %", Производитель="YAGEO Corp.", Рабочие температуры="от –55 °С до +85 °С", Температурный коэффициент емкости=X5R, Фамилия=Паньков
C22: library part c0033, "=Описание", HelpURL=https://www.yageo.com/upload/media/product/productsearch/datasheet/mlcc/UPY-GP_NP0_16V-to-50V_18.pdf, ID=c0033, Корпус=0603, Наименование=CC0603FRNPO9BN471, Напряжение="50 В", Номинал=470, Номинальное напряжение="50 В", Описание="Конденсатор керамический чип 0603 470 пФ 50 В ±1 %", Отклонение="±1 %", Производитель="YAGEO Corp.", Рабочие температуры="от –55 °С до +125 °С", Температурный коэффициент емкости=C0G, Фамилия=Паньков
DD1 DD2: library part dd0007, "=Описание", ID=dd0007, Производитель="Texas Instruments Inc.", Фамилия=Жернаков
  DD1: HelpURL=https://www.ti.com/product/TPS54360B, Входное напряжение="от 4,5 В до 60 В", Выходное напряжение="от 1,0 В до 58,8 В", Коммутируемый ток="до 3,5 А", Корпус=HSOIC-8, Наименование=TPS54360BDDA, Описание="Понижающий преобразователь напряжения 4,5…60 В / 1…58,8 В и 3,5 А", Рабочие температуры="от –40 °С до +150 °С", Частота переключения="от 100 кГц до 2,5 МГц"
  DD2: HelpURL=https://www.ti.com/product/TPS1663, Корпус=HTSSOP-20, Максимальное напряжение="67 В", Наименование=TPS16630PWPR, Напряжение="от 4,5 В до 60 В", Описание="Защитная микросхема eFuse 60 В и 6 А", Рабочие температуры="от –40 °С до +125 °С", Ток="от 0,6 А до 6 А"
DD3: library part dd0008, "=Описание", HelpURL=https://www.analog.com/en/products/ltc2955.html, ID=dd0008, Корпус=SOT-23-8, Максимальное напряжение="36 В", Наименование=LTC2955ITS8-1#TRMPBF, Напряжение="от 1,5 В до 36 В", Описание="Контроллер включения/выключения", Производитель="Analog Devices, Inc.", Рабочие температуры="от –40 °С до +85 °С", Ток=—, Фамилия=Жернаков
L1: library part l0013, "=Описание", HelpURL=https://www.bourns.com/products/magnetic-products/power-inductors-aec-q200-compliant/product/SRP7028A, ID=l0013, Индуктивность="22 мкГн", Корпус="7,3 x 6,6 x 2,8", Максимальное активное сопротивление="190 мОм", Наименование=SRP7028A-220M, Номинал="22 мкГн", Номинальное активное сопротивление="165 мОм", Номинальный ток (при нагреве на 20 °С/40 °С)="2 А", Описание="Катушка индуктивности 22 мкГн ±20 %", Отклонение="±20 %", Производитель="Bourns, Inc.", Рабочее напряжение="не указано", Рабочие температуры="от –55 °С до +150 °С", Резонансная частота="10 МГц", Ток насыщения="3,5 А", Фамилия=Ларионов
L2: library part l0005, "=Описание", HelpURL=https://www.coilcraft.com/en-us/products/power/shielded-inductors/molded-inductor/xal/xal1510, ID=l0005, Индуктивность="8,2 мкГн", Корпус="16,2 x 15,2 x 10", Максимальное активное сопротивление="7,5 мОм", Наименование=XAL1510-822MEB, Номинал="8,2 мкГн", Номинальное активное сопротивление="6 мОм", Номинальный ток (при нагреве на 20 °С/40 °С)="18 А", Описание="Катушка индуктивности 8,2 мкГн ±20 %", Отклонение="±20 %", Производитель="Coilcraft, Inc.", Рабочее напряжение="от 0 В до 60 В", Рабочие температуры="от –40 °С до +125 °С", Резонансная частота="10,8 МГц", Ток насыщения="30 А", Фамилия=Паньков
LED_1: library part hl0001, "=Описание", HelpURL=https://www.vishay.com/leds/list/product-83172/, ID=hl0001, Корпус=0603, Наименование=TLMS1000-GS08, Номинальная длина волны="628 нм", Номинальная сила света="4 мкд", Номинальное падение напряжения="1,8 В", Номинальный прямой ток="15 мА", Описание="Светодиод чип 0603 красный", Производитель="Vishay Intertechnology, Inc.", Рабочие температуры="от -40 °С до +100 °С", Рассеиваемая мощность="40 мВт", Фамилия=Ларионов, Цвет=Red
R1 R6: library part r0028, "=Описание", HelpURL=https://www.yageo.com/upload/media/product/productsearch/datasheet/rchip/PYu-RC_Group_51_RoHS_L_11.pdf, ID=r0028, Корпус=0603, Номинальное напряжение="75 В", Номинальный ток="1 А", Отклонение="±1 %", Производитель="YAGEO Corp."
  R1: Наименование=RC0603FR-07750RL, Номинал=750, Описание="Резистор чип 0603 750 Ом ±1 % 0,1 Вт", Рабочие температуры="от –55 °С до +155 °С", Фамилия=Паньков
  R6: Наименование=RC0603FR-0740K2L, Номинал="40,2 к", Описание="Резистор чип 0603 40,2 кОм ±1 % 0,1 Вт", Рабочие температуры="от -55 °С до +155 °С", Фамилия=Жернаков
R2 R21: library part r0029, "=Описание", HelpURL=https://www.yageo.com/upload/media/product/productsearch/datasheet/rchip/PYu-RC_Group_51_RoHS_L_11.pdf, ID=r0029, Корпус=0603, Номинальное напряжение="75 В", Номинальный ток="1 А", Отклонение="±1 %", Производитель="YAGEO Corp."
  R2: Наименование=RC0603FR-0797K6L, Номинал="97,6 к", Описание="Резистор чип 0603 97,6 кОм ±1 % 0,1 Вт", Рабочие температуры="от -55 °С до +155 °С", Фамилия=Водорезов
  R21: Наименование=RC0603FR-0712RL, Номинал=12, Описание="Резистор чип 0603 12 Ом ±1 % 0,1 Вт", Примечание="Ряд E24", Рабочие температуры="от –55 °С до +155 °С", Фамилия=Паньков
R3 R9: library part r0017, "=Описание", HelpURL=https://www.yageo.com/upload/media/product/productsearch/datasheet/rchip/PYu-RC_Group_51_RoHS_L_11.pdf, ID=r0017, Корпус=0603, Номинальное напряжение="75 В", Номинальный ток="1 А", Производитель="YAGEO Corp.", Рабочие температуры="от -55 °С до +155 °С", Фамилия=Жернаков
  R3: Наименование=RC0603FR-074K99L, Номинал="4,99 к", Описание="Резистор чип 0603 4,99 кОм ±1 % 0,1 Вт", Отклонение="±1 %"
  R9: Наименование=RC0603BR-0753K6L, Номинал="53,6 к", Описание="Резистор чип 0603 53,6 кОм ±0,1 % 0,1 Вт", Отклонение="±0,1 %"
R4: library part r0042, "=Описание", HelpURL=https://www.yageo.com/upload/media/product/productsearch/datasheet/rchip/PYu-RC_Group_51_RoHS_L_11.pdf, ID=r0042, Корпус=0603, Наименование=RC0603FR-071M54L, Номинал="1,54 М", Номинальное напряжение="75 В", Номинальный ток="1 А", Описание="Резистор чип 0603 1,54 МОм ±1 % 0,1 Вт", Отклонение="±1 %", Производитель="YAGEO Corp.", Рабочие температуры="от -55 °С до +155 °С", Фамилия=Жернаков
R5: library part r0020, "=Описание", HelpURL=https://www.yageo.com/upload/media/product/productsearch/datasheet/rchip/PYu-RC_Group_51_RoHS_L_11.pdf, ID=r0020, Корпус=0603, Наименование=RC0603FR-078K06L, Номинал="8,06 к", Номинальное напряжение="75 В", Номинальный ток="1 А", Описание="Резистор чип 0603 8,06 кОм ±1 % 0,1 Вт", Отклонение="±1 %", Производитель="YAGEO Corp.", Рабочие температуры="от -55 °С до +155 °С", Фамилия=Жернаков
R7: library part r0019, "=Описание", HelpURL=https://www.yageo.com/upload/media/product/productsearch/datasheet/rchip/PYu-RC_Group_51_RoHS_L_11.pdf, ID=r0019, Корпус=0603, Наименование=RC0603FR-075K1L, Номинал="5,1 к", Номинальное напряжение="75 В", Номинальный ток="1 А", Описание="Резистор чип 0603 5,1 кОм ±1 % 0,1 Вт", Отклонение="±1 %", Производитель="YAGEO Corp.", Рабочие температуры="от -55 °С до +155 °С", Фамилия=Жернаков
R8 R19: library part r0113, "=Описание", HelpURL=https://www.yageo.com/upload/media/product/productsearch/datasheet/rchip/PYu-RC_Group_51_RoHS_L_11.pdf, ID=r0113, Корпус=0603, Наименование=RC0603FR-0718KL, Номинальное напряжение="75 В", Номинальный ток="1 А", Описание="Резистор чип 0603 18 кОм ±1 % 0,1 Вт", Отклонение="±1 %", Примечание="Ряд E24", Производитель="YAGEO Corp.", Рабочие температуры="от –55 °С до +155 °С", Фамилия=Паньков
  R8: Номинал="18,7 к"
  R19: Номинал="18 к"
R10: library part r0014, "=Описание", HelpURL=https://www.yageo.com/upload/media/product/productsearch/datasheet/rchip/PYu-RC_Group_51_RoHS_L_11.pdf, ID=r0014, Корпус=0603, Наименование=RC0603FR-0710K2L, Номинал="10,2 к", Номинальное напряжение="75 В", Номинальный ток="1 А", Описание="Резистор чип 0603 10,2 кОм ±1 % 0,1 Вт", Отклонение="±1 %", Производитель="YAGEO Corp.", Рабочие температуры="от -55 °С до +155 °С", Фамилия=Жернаков
R11: library part r0011, "=Описание", HelpURL=https://www.yageo.com/upload/media/product/productsearch/datasheet/rchip/PYu-RC_Group_51_RoHS_L_11.pdf, ID=r0011, Корпус=0603, Наименование=RC0603FR-072R2L, Номинал=2,1, Номинальное напряжение="75 В", Номинальный ток="1 А", Описание="Резистор чип 0603 2,2 Ом ±1 % 0,1 Вт", Отклонение="±1 %", Примечание="Ряд E24", Производитель="YAGEO Corp.", Рабочие температуры="от –55 °С до +155 °С", Фамилия=Ларионов
R12: library part r0009, "=Описание", HelpURL=https://www.yageo.com/upload/media/product/productsearch/datasheet/rchip/PYu-RC_Group_51_RoHS_L_11.pdf, ID=r0009, Корпус=0603, Наименование=RC0603FR-07220RL, Номинал=220, Номинальное напряжение="75 В", Номинальный ток="1 А", Описание="Резистор чип 0603 220 Ом ±1 % 0,1 Вт", Отклонение="±1 %", Производитель="YAGEO Corp.", Рабочие температуры="от -55 °С до +155 °С", Фамилия=Ларионов
R13 R14: library part r0115, "=Описание", HelpURL=https://www.yageo.com/upload/media/product/productsearch/datasheet/rchip/PYu-RC_Group_51_RoHS_L_11.pdf, ID=r0115, Корпус=0603, Наименование=RC0603FR-0720KL, Номинал="20 к", Номинальное напряжение="75 В", Номинальный ток="1 А", Описание="Резистор чип 0603 20 кОм ±1 % 0,1 Вт", Отклонение="±1 %", Примечание="Ряд E24", Производитель="YAGEO Corp.", Рабочие температуры="от –55 °С до +155 °С", Фамилия=Паньков
R16: library part r0076, "=Описание", HelpURL=https://www.yageo.com/upload/media/product/productsearch/datasheet/rchip/PYu-RC_Group_51_RoHS_L_11.pdf, ID=r0076, Корпус=0603, Наименование=RC0603FR-071KL, Номинал="1 к", Номинальное напряжение="75 В", Номинальный ток="1 А", Описание="Резистор чип 0603 1 кОм ±1 % 0,1 Вт", Отклонение="±1 %", Примечание="Ряд E24", Производитель="YAGEO Corp.", Рабочие температуры="от –55 °С до +155 °С", Фамилия=Ларионов
R17: library part r0084, "=Описание", HelpURL=https://www.yageo.com/upload/media/product/productsearch/datasheet/rchip/PYu-RC_Group_51_RoHS_L_11.pdf, ID=r0084, Корпус=0603, Наименование=RC0603FR-072KL, Номинал="1,96 к", Номинальное напряжение="75 В", Номинальный ток="1 А", Описание="Резистор чип 0603 2 кОм ±1 % 0,1 Вт", Отклонение="±1 %", Примечание="Ряд E24", Производитель="YAGEO Corp.", Рабочие температуры="от –55 °С до +155 °С", Фамилия=Ларионов
R18: library part r0091, "=Описание", HelpURL=https://www.yageo.com/upload/media/product/productsearch/datasheet/rchip/PYu-RC_Group_51_RoHS_L_11.pdf, ID=r0091, Корпус=0603, Наименование=RC0603FR-073K9L, Номинал="3,9 к", Номинальное напряжение="75 В", Номинальный ток="1 А", Описание="Резистор чип 0603 3,9 кОм ±1 % 0,1 Вт", Отклонение="±1 %", Примечание="Ряд E24", Производитель="YAGEO Corp.", Рабочие температуры="от –55 °С до +155 °С", Фамилия=Паньков
R20: library part r0071, "=Описание", HelpURL=https://www.yageo.com/upload/media/product/productsearch/datasheet/rchip/PYu-RC_Group_51_RoHS_L_11.pdf, ID=r0071, Корпус=0603, Наименование=RC0603FR-07620RL, Номинал=620, Номинальное напряжение="75 В", Номинальный ток="1 А", Описание="Резистор чип 0603 620 Ом ±1 % 0,1 Вт", Отклонение="±1 %", Примечание="Ряд E24", Производитель="YAGEO Corp.", Рабочие температуры="от –55 °С до +155 °С", Фамилия=Паньков
S1: library part s0005, "=Описание", HelpURL=https://www.ckswitches.com/products/switches/product-details/DIP/SDA/SDA01H1SBD/, ID=s0005, Количество контактов=2, Корпус="4,52 х 9,30 х 5,45", Наименование=SDA01H1SBD, Описание="2-х позиционный движковый переключатель", Производитель=C&K, Промывка=Запрещена, Рабочие температуры="от –40 °С до +85 °С", Сопротивление контакта="50 мОм", Ток нагрузки="100 мА @ 5 В", Фамилия=Паньков
S2: library part s0002, "=Описание", HelpURL=http://www.klsele.com/products/Switches/Tact-Switches-Series/939.html, ID=s0002, Количество контактов=4, Корпус="6,00 x 6,00 x 5,00", Наименование=KLS7-TS6604-5.0-180-B, Описание="Тактовая кнопка поверхностного монтажа", Производитель="Ningbo KLS Electronic Co., Ltd.", Промывка=Запрещена, Рабочие температуры="от –20 °С до +70 °С", Сопротивление контакта="50 мОм", Ток нагрузки="50 мА @ 12 В", Фамилия=Паньков
VD1: library part vd0016, "=Описание", HelpURL=https://www.vishay.com/product?docid=85161, ID=vd0016, Корпус=DO-219AB, Наименование=BZD17C15P, Номинальное напряжение стабилизации="15 В", Номинальный ток стабилизации="50 мА", Описание="Стабилитрон 15 В", Производитель="Vishay Intertechnology, Inc.", Рабочие температуры="от –55 °С до +150 °С", Разброс напряжения стабилизации="13,8...15,6 В", Фамилия=Жернаков
VD2 VD4 VD5: library part vd0006, "=Описание", HelpURL=https://www.vishay.com/diodes/list/product-85653/, ID=vd0006, Корпус=SOD-123, Максимальное обратное напряжение="70 В", Максимальное прямое напряжение="0,75 В", Максимальный прямой ток="0,07 А", Наименование=BAS170WS-HE3-08, Описание="Диод Шоттки 70 В 0,07 А", Производитель="Vishay Intertechnology, Inc.", Рабочие температуры="от –55 °С до +125 °С", Фамилия=Ларионов
VD3: library part vd0009, "=Описание", HelpURL=https://www.littelfuse.com/products/tvs-diodes/surface-mount/1_5smc.aspx, ID=vd0009, Корпус=DO-214AB, Наименование=1.5SMC62CA, Описание="Двунаправленная диодная сборка для подавления помех 53 В", Производитель="Littelfuse, Inc.", Фамилия=Ларионов
VD6: library part vd0005, "=Описание", HelpURL=https://www.vishay.com/product?docid=85161, ID=vd0005, Корпус=DO-219AB, Наименование=BZD17C5V1P, Номинальное напряжение стабилизации="5,1 В", Номинальный ток стабилизации="100 мА", Описание="Стабилитрон 5,1 В", Производитель="Vishay Intertechnology, Inc.", Рабочие температуры="от –55 °С до +150 °С", Разброс напряжения стабилизации="4,8...5,4 В", Фамилия=Паньков
VT1 VT2 VT3: library part vt0005, "=Описание", HelpURL=https://www.ti.com/product/CSD19532Q5B, ID=vt0005, Корпус=SON-8, Наименование=CSD19532Q5BT, Напряжение затвор — исток="±20 В", Описание="Полевой N-канальный МДП-транзистор 100 В 17 А", Производитель="Texas Instruments Inc.", Рабочие температуры="от –55 °С до +150 °С", Сопротивление сток — исток="5,7 мОм", Ток стока="17 А", Фамилия=Жернаков
  VT1 VT2: Напряжение сток — исток="100 В"
  VT3: Напряжение сток — исток="80 В"
X1 X2: library part x0006, "=Описание", Contact_3=GND, Contact_4=GND, HelpURL=https://www.te.com/usa-en/product-4-1775099-0.html, ID=x0006, Наименование=4-1775099-0, Описание="ATX Power 4 pin гнездо прямой", Производитель="TE Connectivity", Фамилия=Ларионов
  X1: Contact_1=+48V, Contact_2=+48V
  X2: Contact_1=+24V, Contact_2=+24V
X3: library part x0043, "=Описание", Contact_1=nINT, Contact_2=GND, Contact_3=nKILL, HelpURL=http://en.connfly.group/product/xVkr=EusQssAN0gN=Aos=mU+UrVkR9kqEAN0gN0MUR+g+NB+A, ID=x0043, Наименование=DS1069-3MVW6X, Описание="CWF 3 pin 2,5 мм вилка прямой", Производитель="Connfly Electronic Co., Ltd.", Фамилия=Паньков
X4: library part x0032, "=Описание", Contact_1=+24V, Contact_2=GND, HelpURL=http://en.connfly.group/product/xVkr=EusQssAN0gN=Aos=mU+UrVkR9kqEAN0gN0AUCUNB+A, ID=x0032, Наименование=DS1023-1x2SF11, Описание="PBS 2 pin 2,54 мм гнездо прямой", Производитель="Connfly Electronic Co., Ltd.", Фамилия=Паньков

## Free pads (board coordinates)
  round 6 hole 3: 2(61,117) 3(61,74) 4(163,74) 5(163,117)

## Via types
v1: diameter 0.8, hole 0.5, Top Layer to Bottom Layer, tented both sides, 252 vias
v2: diameter 0.8, hole 0.5, Top Layer to Bottom Layer, 18 vias

## Nets (pads, with @x,y where several pads share a name; then routed paths per layer and width w, separated by ;. In a path a pad name is that pad's centre, name@x,y a point inside that pad or via, vN(x,y) a via of type N, cw(c..) or ccw(c..) an arc to the next point about the centre after c; other vN are vias at no path point)
24V_OUT: C23.2 L2.2 R19.2 R21.2 X2.1 X2.2 X4.1 | length 6
  Top Layer w0.15: 141.7,105.1 C23.2 ; L2.2 148.4,85.8 148.6,86
48V_IN: C5.1 DD2.1 DD2.2 DD2.3 DD2.6 R1.2 R4.2 VD3.1 X1.1 X1.2 | length 5
  Top Layer w0.15: R4.2 90.9,107.8 ; DD2.6@93.025,105.5 DD2.6
  Top Layer w0.25: 90.9,107.4 90.9,106.3 91.7,105.5 DD2.6@93.025,105.5
+5V: C11.1 DD3.6 L1.2 R9.2 R12.2 R16.2 S2.1 | length 59.2
  Top Layer w0.254: R12.2@92.45,79.25 92.45,81.8 94.5,81.8 94.7,82 94.7,83.8 95.05,84.15 S2.1@97.15,84.15 ; L1.2@102.9,91.2 105.8,91.2 107.25,89.75 C11.1 107.25,86.35 107.85,85.75 107.85,84.15 ; S2.1@104.65,84.15 107.85,84.15 ; DD3.6 123.175,83.175 123.175,83.125 124.05,82.25 R16.2 124.25,82.4 126.1,82.4 126.3,82.2 126.3,77.6 123.9,75.2 111.8,75.2 111.4,75.6 111.4,80.6 107.85,84.15
BOOT: C6.2 DD1.1 | length 5
  Top Layer w0.25: DD1.1 80.395,92.205 79.8,92.8 79.8,93.9 80.7,94.8 C6.2
EN: D1.1 DD3.7 | length 26.7
  Top Layer w0.254: DD3.7 v2@123.525,83.825 ; D1.1 127.7,103.3 128.8,103.3 129.2,102.9 v2(129.2,102.2)
  Bottom Layer w0.254: v2(123.6,83.9) 125.5,83.9 129.2,87.6 v2(129.2,102.2)
FB_1: C18.1 C22.2 D1.5 R18.2 R19.1 R20.2 | length 23.1
  Top Layer w0.15: 131.1,110.3 R20.2 ; 131.4,111.5 v2(131.4,112.1) ; C18.1 C18.1@133.85,103.15
  Top Layer w0.254: R19.1 131.4,100.3 131.2,100.5 131.2,101.6 131.4,101.8 134.9,101.8 135.3,102.2 v2(135.3,103.1) C18.1
  Bottom Layer w0.254: v2(131.4,112.1) 134.3,112.1 135.3,111.1 v2(135.3,103.1)
FB_2: DD1.5 R9.1 R10.2 | length 12.1
  Top Layer w0.254: DD1.5@86.83,88.4 88.7,88.4 89.1,88 89.1,86.2 87.9,85 R10.2 R9.1
GND: C1.2 C2.2 C3.2 C4.2 C5.2 C7.2 C8.2 C9.2 C10.2 C11.2 C12.2 C13.2 C14.2 C15.2 C19.2 C20.2 C21.2 C23.1 D1.6 D1.12 D1.15 DD1.0 DD1.7 DD2.0 DD2.12 DD3.1 DD3.4 LED_1.1 pad.2 pad.3 pad.4 pad.5 R2.1 R7.2 R8.1 R10.1 R20.1 S1.2 S2.2 VD2.1 VD4.2 VD5.2 VD6.2 VT1.S VT3.S X1.3 X1.4 X2.3 X2.4 X3.2 X4.2 | length 5
  Top Layer w0.15: v2(123.5,106.5) v2@123.55,106.45 ; v2(123.5,109.5) v2@123.6,109.4 ; D1.15@125.25,106.45 D1.15
  Top Layer w0.25: v2@123.55,106.45 D1.15@125.25,106.45 ; v2@123.6,109.4 125,109.4 125.3,109.1 D1.12
  other v1: 66,72 69,72 72,72 75,72 78,72 81,72 84,72 87,72 90,72 93,72 96,72 99,72 102,72 105,72 108,72 111,72 114,72 117,72 120,72 123,72 126,72 129,72 132,72 135,72 138,72 141,72 144,72 147,72 150,72 153,72 156,72 159,72 67.5,75 70.5,75 73.5,75 76.5,75 79.5,75 82.5,75 85.5,75 88.5,75 91.5,75 94.5,75 97.5,75 100.5,75 103.5,75 106.5,75 109.5,75 60,78 63,78 66,78 69,78 72,78 75,78 78,78 81,78 84,78 96,78 99,78 102,78 105,78 108,78 129,78 132,78 135,78 138,78 141,78 144,78 153,78 159,78 162,78 61.5,81 64.5,81 67.5,81 70.5,81 73.5,81 76.5,81 79.5,81 82.5,81 85.5,81 94.5,81 97.5,81 100.5,81 103.5,81 106.5,81 109.5,81 118.5,81 121.5,81 127.5,81 136.5,81 139.5,81 151.5,81 154.5,81 157.5,81 163.5,81 60,84 63,84 66,84 69,84 72,84 75,84 78,84 81,84 84,84 99,84 102,84 111,84 129,84 138,84 141,84 153,84 156,84 159,84 61.5,87 64.5,87 67.5,87 70.5,87 73.5,87 76.5,87 82.5,87 85.5,87 94.5,87 97.5,87 100.5,87 103.5,87 112.5,87 118.5,87 121.5,87 136.5,87 139.5,87 151.5,87 154.5,87 157.5,87 160.5,87 163.5,87 66,90 69,90 72,90 105,90 108,90 111,90 114,90 138,90 141,90 153,90 156,90 159,90 162,90 165,90 70.5,93 85.5,93 91.5,93 106.5,93 109.5,93 112.5,93 118.5,93 121.5,93 136.5,93 139.5,93 163.5,93 66,96 69,96 72,96 111,96 114,96 135,96 138,96 141,96 165,96 70.5,99 73.5,99 109.5,99 112.5,99 127.5,99 160.5,99 163.5,99 66,102 69,102 96,102 111,102 114,102 162,102 165,102 67.5,105 70.5,105 79.5,105 82.5,105 85.5,105 112.5,105 136.5,105 78,108 87,108 96,108 144,108 147,108 150,108 165,108 70.5,111 73.5,111 76.5,111 97.5,111 100.5,111 103.5,111 106.5,111 118.5,111 136.5,111 139.5,111 142.5,111 145.5,111 148.5,111 151.5,111 160.5,111 163.5,111 96,114 99,114 108,114 111,114 114,114 117,114 120,114 132,114 135,114 138,114 141,114 144,114 147,114 150,114 153,114 156,114 159,114 91.5,117 94.5,117 97.5,117 100.5,117 103.5,117 106.5,117 109.5,117 112.5,117 115.5,117 118.5,117 121.5,117 124.5,117 127.5,117 130.5,117 133.5,117 136.5,117 139.5,117 142.5,117 145.5,117 148.5,117 151.5,117 154.5,117 157.5,117
NetC1_1: C1.1 C2.1 C7.1 C14.1 DD1.2 DD2.18 DD2.19 DD2.20 R11.2 VD5.1 VT2.D
  other v2: 77.1,95.4 108.1,107.8
NetC3_1: C3.1 DD1.6 R3.2 | length 5.6